# Altium PCB SSB-Demod.PcbDoc
Units mm, origin at the board's own origin, x right, y up, seen from the top; angles counter-clockwise.
Board outline 90.2 x 38.1 mm, 2 copper layers (Top Layer, Bottom Layer); 120 components, 62 nets, 295 pads, 81 vias.
Unrouted connection lines stored in the file: 25.
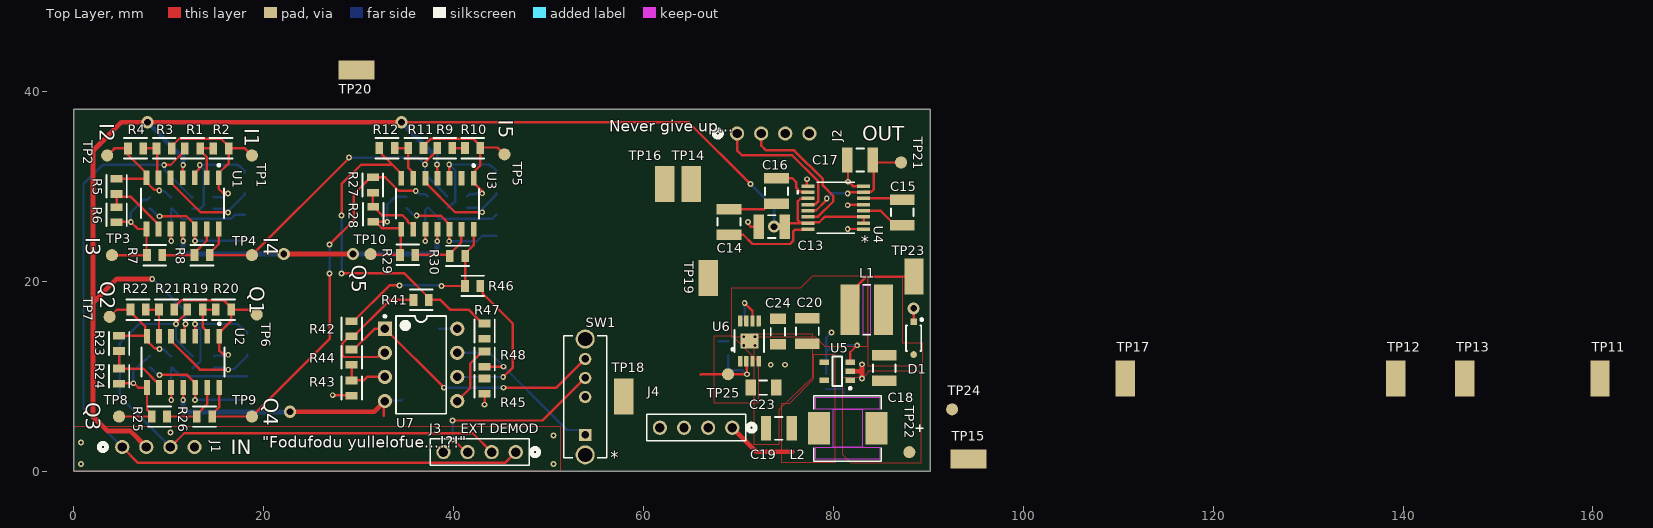
[diagram p0: Top Layer view]
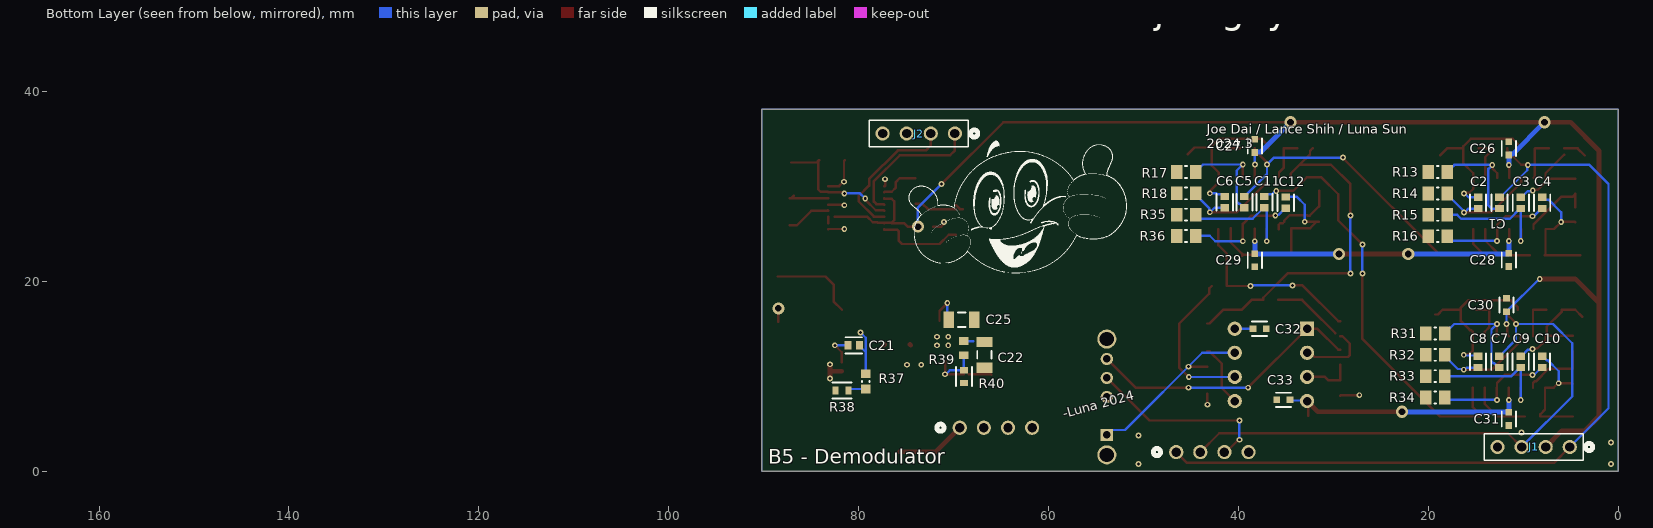
[diagram p1: Bottom Layer view, seen from below]
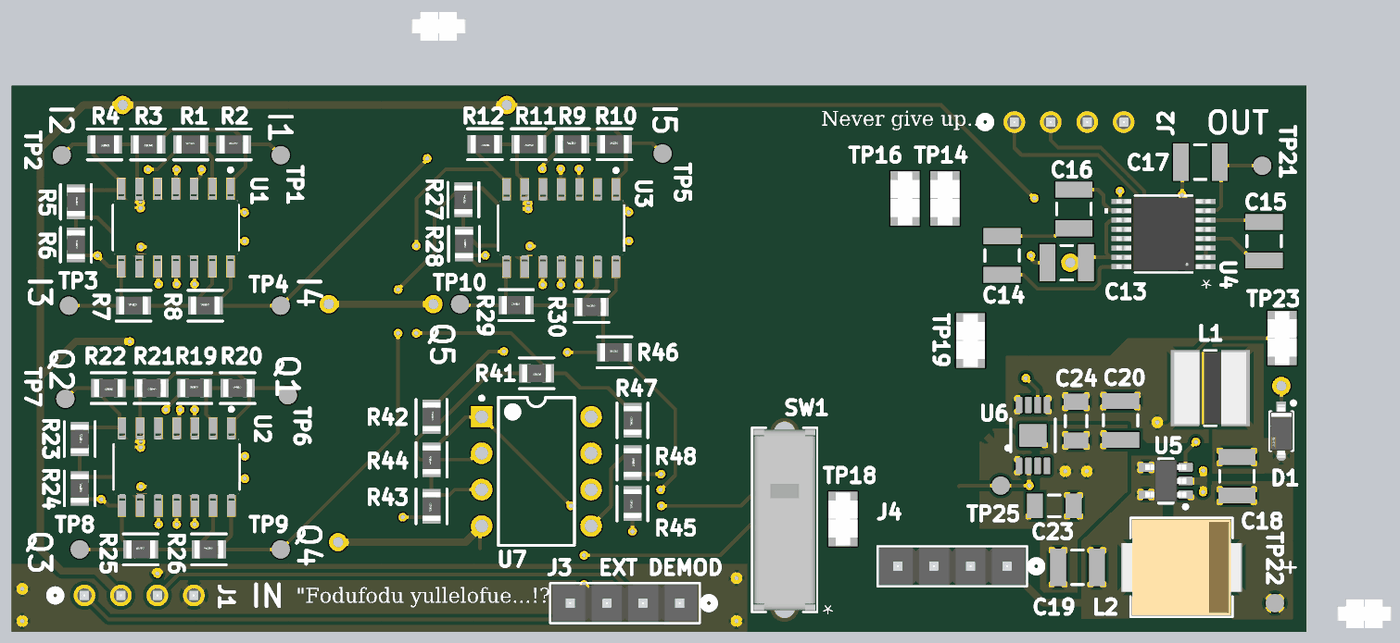
[diagram p2: 3D render of the assembled board from above, using the file's embedded part models]
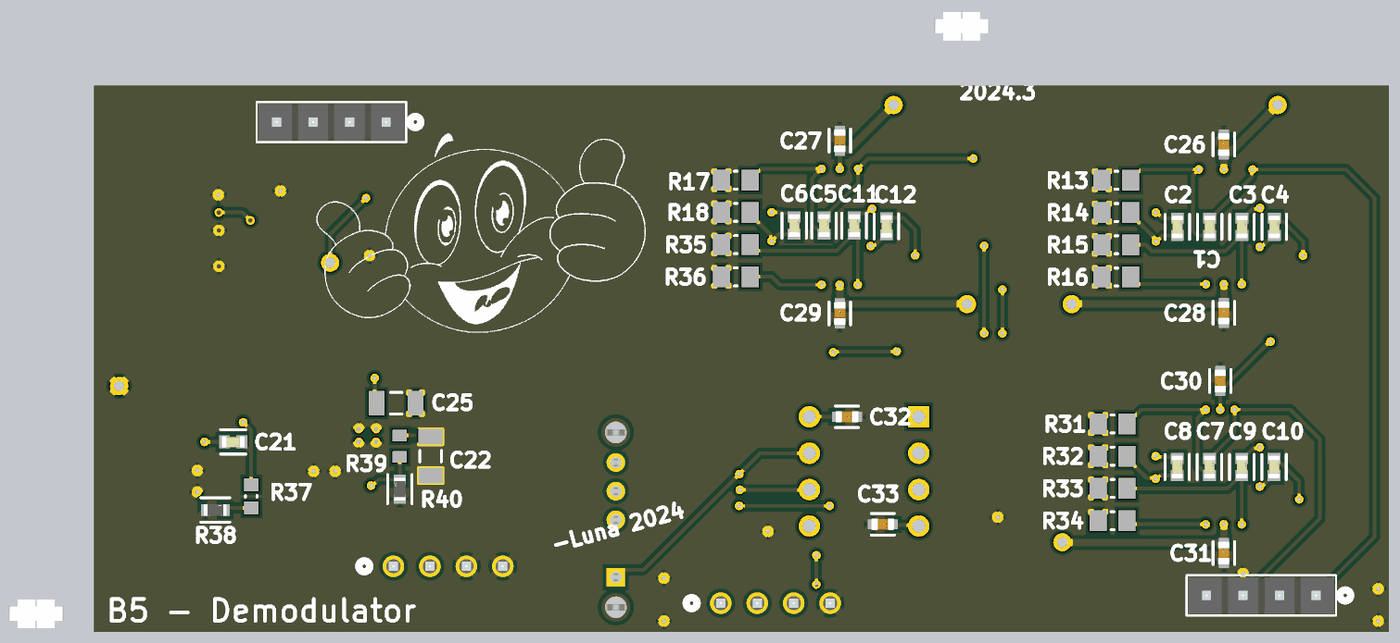
[diagram p3: 3D render of the assembled board from below, using the file's embedded part models]

## Layer stack, top to bottom
Top Solder: solder mask 0.0102, Solder Resist, Dk 3.5
Top Layer: signal copper 0.0356
Dielectric 1: dielectric 0.32, FR-4, Dk 4.8
Bottom Layer: signal copper 0.0356
Bottom Solder: solder mask 0.0102, Solder Resist, Dk 3.5

## Board outline
0,0 0,38.1 90.2,38.1 90.2,0

## Design rules (kind name [scope] priority, off if disabled: settings)
Clearance [All] p1: gap=0.254 ignorepadtopadclearanceinfootprint=FALSE except(0: Arc-Hole Track-Hole SMDPad-Hole THPad-Hole Via-Hole Fill-Hole Poly-Hole Region-Hole Text-Hole; 0.127: SMDPad-SMDPad)
HoleSize [All] p1: absolutevalues=TRUE maxlimit=22.86 minlimit=0.305 maxpercent=80.000 minpercent=20.000
MinimumSolderMaskSliver [All] p1: minsoldermaskwidth=0.025
PolygonConnect [All] p1: connectstyle=Relief reliefconductorwidth=0.512 reliefentries=4 polygonreliefangle="45 Angle" airgapwidth=0.254
RoutingVias [All] p1: holewidth=0.305 width=0.61 viastyle="Through Hole" minholewidth=0.305 minwidth=0.61 maxholewidth=2.54 maxwidth=5.08
SilkToSilkClearance [All] p1: silktosilkclearance=0
SilkToSolderMaskClearance [IsPad] p1: minsilkscreentomaskgap=0.025 clearancetoexposedcopper=TRUE
SolderMaskExpansion [All] p1: expansion=0.102 istentingtop=FALSE
Width [All] p1: maxlimit=5.08 minlimit=0.254 preferedwidth=0.254
26 further rules are at their usual default settings.

## Classes and differential pairs
component class U_SummingAmplifier: C32 C33 R41 R42 R43 R44 U7
component class U_DifferenceAmplifier: R45 R46 R47 R48
component class TopLevel: J1 J2 J3 J4 SW1 TP11 TP12 TP13 TP14 TP15 TP16 TP17 TP18 TP19 TP20
component class U_SSBDemod: C1 C2 C3 C4 C5 C6 C7 C8 C9 C10 C11 C12 C26 C27 C28 C29 C30 C31 R1 R2 R3 R4 R5 R6 R7 R8 R9 R10 R11 R12 R13 R14 R15 R16 R17 R18 R19 R20 R21 R22 R23 R24 R25 R26 R27 R28 R29 R30 R31 R32 R33 R34 R35 R36 TP1 TP2 TP3 TP4 TP5 TP6 TP7 TP8 TP9 TP10 U1 U2 U3
component class U_PowerRail: C18 C19 C20 C21 C22 C23 C24 C25 D1 L1 L2 R37 R38 R39 R40 TP22 TP23 TP24 TP25 U5
component class U_AudioAmp: C13 C14 C15 C16 C17 TP21 U4

## Components (designator, comment, footprint, x,y, rotation, side; value= is the part's Value field where it differs from the comment)
C1 "0.01uF" FP-C0603C-CF-MFG 12.487,28.25 r270 bottom value="10,000 pF"
C2 "0.01uF" FP-C0603C-CF-MFG 14.737,28.25 r270 bottom value="10,000 pF"
C3 "0.01uF" FP-C0603C-CF-MFG 10.237,28.25 r270 bottom value="10,000 pF"
C4 "0.01uF" FP-C0603C-CF-MFG 7.987,28.25 r270 bottom value="10,000 pF"
C5 "0.01uF" FP-C0603C-CF-MFG 39.35,28.337 r270 bottom value="10,000 pF"
C6 "0.01uF" FP-C0603C-CF-MFG 41.425,28.337 r270 bottom value="10,000 pF"
C7 "0.01uF" FP-C0603C-CF-MFG 12.5,11.5 r270 bottom value="10,000 pF"
C8 "0.01uF" FP-C0603C-CF-MFG 14.75,11.5 r270 bottom value="10,000 pF"
C9 "0.01uF" FP-C0603C-CF-MFG 10.25,11.5 r270 bottom value="10,000 pF"
C10 "0.01uF" FP-C0603C-CF-MFG 8,11.5 r270 bottom value="10,000 pF"
C11 "0.01uF" FP-C0603C-CF-MFG 37.25,28.337 r270 bottom value="10,000 pF"
C12 "0.01uF" FP-C0603C-CF-MFG 35,28.287 r270 bottom value="10,000 pF"
C13 "885012209047" 1210 73.5,25.75 r180 top value=1UF
C14 "885012209047" 1210 69,26.25 r270 top value=1UF
C15 "885012209047" 1210 87.25,27.25 r270 top value=1UF
C16 "885012209047" 1210 74,29.5 r90 top value=1UF
C17 "885012209047" 1210 82.804,32.766 r180 top value=1UF
C18 "885012209047" 1210 85.35,10.85 r270 top value=1UF
C19 "885012109014" 1210 74.25,4.5 r0 top value=22UF
C20 "885012109014" 1210 77.25,14.75 r90 top value=22UF
C21 "C0603C331F5GACTU" FP-C0603C-CF-MFG 80.5,13.25 r0 bottom value="330 pF"
C22 "885012008055" 1206 66.75,12.25 r90 bottom value=10000PF
C23 "885012208069" 1206 72.631,8.792 r180 top value=10UF
C24 "885012208069" 1206 74.15,14.7 r90 top value=10UF
C25 "885012008055" 1206 69.15,15.95 r0 bottom value=10000PF
C26 "C1608X7R1H104K080AA" FP-C1608-080-0_1-MFG 11.5,34 r270 bottom
C27 "C1608X7R1H104K080AA" FP-C1608-080-0_1-MFG 38.25,34.262 r270 bottom
C28 "C1608X7R1H104K080AA" FP-C1608-080-0_1-MFG 11.5,22.25 r270 bottom
C29 "C1608X7R1H104K080AA" FP-C1608-080-0_1-MFG 38.25,22.212 r270 bottom
C30 "C1608X7R1H104K080AA" FP-C1608-080-0_1-MFG 11.75,17.5 r270 bottom
C31 "C1608X7R1H104K080AA" FP-C1608-080-0_1-MFG 11.5,5.5 r270 bottom
C32 "C1608X7R1H104K080AA" FP-C1608-080-0_1-MFG 37.75,15 r0 bottom
C33 "C1608X7R1H104K080AA" FP-C1608-080-0_1-MFG 35.25,7.5 r0 bottom
D1 "MBR0580-TP" FP-SOD-123-IPC_C 88.45,14 r270 top
J1 "PRPC004SAAN-RC" CONN4_PRPC004_SUL 5.08,2.54 r180 bottom
J2 "PRPC004SAAN-RC" CONN4_PRPC004_SUL 69.85,35.56 r180 bottom
J3 "PRPC004SAAN-RC" CONN4_PRPC004_SUL 46.54,2 r0 top
J4 "PRPC004SAAN-RC" CONN4_PRPC004_SUL 69.342,4.572 r0 top
L1 "SRR4028-470Y" IND_BOURNS_SRR4028 83.5,17 r0 top
L2 "ASPI-0630LR-150M-T15" IND_ASPI-0630LR_ABR 81.5,4.5 r180 top
R1 "100k" FP-RC0805-0_6-IPC_C 12.487,34 r0 top
R2 "100k" FP-RC0805-0_6-IPC_C 15.487,34 r0 top
R3 "100k" FP-RC0805-0_6-IPC_C 9.5,34 r180 top
R4 "100k" FP-RC0805-0_6-IPC_C 6.487,34 r180 top
R5 "100k" FP-RC0805-0_6-IPC_C 4.487,30 r270 top
R6 "100k" FP-RC0805-0_6-IPC_C 4.487,27 r270 top
R7 "100k" FP-RC0805-0_6-IPC_C 8.5,22.75 r0 top
R8 "100k" FP-RC0805-0_6-IPC_C 13.5,22.75 r0 top
R9 "100k" FP-RC0805-0_6-IPC_C 39.052,34.012 r0 top
R10 "100k" FP-RC0805-0_6-IPC_C 42,34.012 r0 top
R11 "100k" FP-RC0805-0_6-IPC_C 36.023,34.012 r180 top
R12 "100k" FP-RC0805-0_6-IPC_C 32.975,34.012 r180 top
R13 "280" RESC2013X60X35ML10T20 18.987,31.5 r180 bottom
R14 "2.21k" RESC2013X60X35ML10T20 18.987,29.25 r180 bottom
R15 "8.87k" RESC2013X60X35ML10T20 18.987,27 r180 bottom
R16 "35.7k" RESC2013X60X35ML10T20 18.987,24.75 r180 bottom
R17 "143k" RESC2013X60X35ML10T20 45.5,31.512 r180 bottom
R18 "649k" RESC2013X60X35ML10T20 45.5,29.262 r180 bottom
R19 "100k" FP-RC0805-0_6-IPC_C 12.75,17 r0 top
R20 "100k" FP-RC0805-0_6-IPC_C 15.75,17 r0 top
R21 "100k" FP-RC0805-0_6-IPC_C 9.75,17 r180 top
R22 "100k" FP-RC0805-0_6-IPC_C 6.75,17 r180 top
R23 "100k" FP-RC0805-0_6-IPC_C 4.75,13.448 r270 top
R24 "100k" FP-RC0805-0_6-IPC_C 4.75,10 r270 top
R25 "100k" FP-RC0805-0_6-IPC_C 9,5.75 r0 top
R26 "100k" FP-RC0805-0_6-IPC_C 13.75,5.75 r0 top
R27 "100k" FP-RC0805-0_6-IPC_C 31.475,30.139 r270 top
R28 "100k" FP-RC0805-0_6-IPC_C 31.525,27.062 r270 top
R29 "100k" FP-RC0805-0_6-IPC_C 35.15,22.787 r0 top
R30 "100k" FP-RC0805-0_6-IPC_C 40.402,22.662 r0 top
R31 "976" RESC2013X60X35ML10T20 19.25,14.5 r180 bottom
R32 "4.42k" RESC2013X60X35ML10T20 19.25,12.25 r180 bottom
R33 "17.8k" RESC2013X60X35ML10T20 19.25,10 r180 bottom
R34 "71.5k" RESC2013X60X35ML10T20 19.25,7.75 r180 bottom
R35 "294k" RESC2013X60X35ML10T20 45.5,27.012 r180 bottom
R36 "2.26M" RESC2013X60X35ML10T20 45.5,24.762 r180 bottom
R37 "RC0603FR-0746K4L" RESC0603(1608)_N 79.25,9.45 r90 bottom value="46400.00 Ohm"
R38 "RC0603FR-0710KL" FP-RC0603-0_55-IPC_C 81.75,8.5 r180 bottom
R39 "RC0603FR-0732K4L" RESC1608X55X25ML10T15 68.9,12.95 r90 bottom
R40 "RC0603FR-0710KL" FP-RC0603-0_55-IPC_C 68.9,9.95 r90 bottom
R41 "100k" FP-RC0805-0_6-IPC_C 36.576,18.034 r180 top
R42 "100k" FP-RC0805-0_6-IPC_C 29.25,15 r270 top
R43 "100k" FP-RC0805-0_6-IPC_C 29.25,8.75 r90 top
R44 "100k" FP-RC0805-0_6-IPC_C 29.25,12 r90 top
R45 "100k" FP-RC0805-0_6-IPC_C 43.25,8.948 r90 top
R46 "100k" FP-RC0805-0_6-IPC_C 42,19.5 r0 top
R47 "100k" FP-RC0805-0_6-IPC_C 43.25,14.75 r90 top
R48 "100k" FP-RC0805-0_6-IPC_C 43.25,11.802 r270 top
SW1 "OS103011MS8QP1" DIP4_SP3T-TOP_4P3X8P6_CNK 53.848,3.81 r180 top
TP1 "I1" TP-PAD 18.75,33.25 r0 top
TP2 "I2" TP-PAD 3.5,33.25 r0 top
TP3 "I3" TP-PAD 4,22.75 r0 top
TP4 "I4" TP-PAD 18.75,22.75 r0 top
TP5 "I5" TP-PAD 45.35,33.362 r90 top
TP6 "Q1" TP-PAD 19.25,16.5 r90 top
TP7 "Q2" TP-PAD 3.75,16.25 r90 top
TP8 "Q3" TP-PAD 4.75,5.75 r90 top
TP9 "Q4" TP-PAD 18.75,5.75 r90 top
TP10 "Q5" TP-PAD 31.242,22.86 r90 top
TP11 "EXT_DEMOD_IN" KSTN-5019_V 160.75,9.75 r90 top
TP12 "IN_I" KSTN-5019_V 139.25,9.75 r90 top
TP13 "SUM_OUT" KSTN-5019_V 146.5,9.75 r90 top
TP14 "AUDIO_L" KSTN-5019_V 65.024,30.226 r90 top
TP15 "IN_Q" KSTN-5019_V 94.234,1.27 r180 top
TP16 "AUDIO_R" KSTN-5019_V 62.23,30.226 r270 top
TP17 "DIFF_OUT" KSTN-5019_V 110.75,9.75 r90 top
TP18 "OUT" KSTN-5019_V 57.912,7.874 r270 top
TP19 "GND" KSTN-5019_V 66.802,20.32 r90 top
TP20 "GND" KSTN-5019_V 29.75,42.25 r0 top
TP21 "AUDIO_VSS" TP-PAD 87.122,32.512 r0 top
TP22 "SW" TP-PAD 88,2 r270 top
TP23 "V_NEG" KSTN-5019_V 88.5,20.5 r90 top
TP24 "CUK_FB" TP-PAD 92.5,6.5 r90 top
TP25 "LDO_FB" TP-PAD 68.9,10.2 r180 top
U1 "OPA4197IDR" FP-D0014A-MFG 11.447,28.2 r270 top
U2 "OPA4197IDR" FP-D0014A-MFG 11.5,11.5 r270 top
U3 "OPA4197IDR" FP-D0014A-MFG 38.29,28.162 r270 top
U4 "MAX9722AEUE+" 21-0066J_16 80.25,27.75 r180 top
U5 "LM2611AMF/NOPB" DBV0005A_N 80.4,10.525 r180 top
U7 "LM4562NA" N08E 36.56,11.19 r0 top

## Footprints (in the part's own frame and the unit in brackets; to place one, negate y for a bottom-side part, rotate by r counter-clockwise, add the part's x,y. Pads: shape width x height; smd on the part's side, far side on the other; paste and mask are expansions set on the pad)
21-0066J_16 [mm]
  rect 1.379x0.355 smd paste+0 mask+0: 1(-2.937,2.275) 2(-2.937,1.625) 3(-2.937,0.975) 4(-2.937,0.325) 5(-2.937,-0.325) 6(-2.937,-0.975) 7(-2.937,-1.625) 8(-2.937,-2.275) 9(2.937,-2.275) 10(2.937,-1.625) 11(2.937,-0.975) 12(2.937,-0.325) 13(2.937,0.325) 14(2.937,0.975) 15(2.937,1.625) 16(2.937,2.275)
  silkscreen extent -2,-2.68 4.13,2.68, body extent -3.28,-2.55 3.28,2.55, height 1.09
1206 [mm] "Chip Capacitor, Body 3.2x1.6mm, IPC High Density"
  rect 1.1x1.7 smd: 1(-1.35,0) 2(1.35,0)
  silkscreen extent -0.4,-0.75 0.4,0.75, body extent -1.7,-0.9 1.7,0.9, height 1.3
1210 [mm] "Chip Capacitor, Body 3.2x2.5mm, IPC High Density"
  rect 1.1x2.6 smd: 1(-1.35,0) 2(1.35,0)
  silkscreen extent -0.4,-1.2 0.4,1.2, body extent -1.7,-1.35 1.7,1.35, height 1.3
CONN4_PRPC004_SUL [mil]
  round 59 / inner round 60 / far side round 59 hole 39 paste-99999 mask+0: 1(0,0) 2(-100,0) 3(-200,0) 4(-300,0)
  silkscreen extent -355,-55 95,55, body extent -350,-50 50,50, height 340
DBV0005A_N [mm] "SOT23, 5-Leads, Body 3.05x1.75mm, Pitch 0.95mm, IPC Medium Density"
  rrect17% 1x0.6 smd: 1(-1.375,0.95) 2(-1.375,0) 3(-1.375,-0.95) 4(1.375,-0.95) 5(1.375,0.95)
  silkscreen extent -1.5,-1.55 0.5,1.92, body extent -1.42,-1.46 1.42,1.46, height 1.08
DIP4_SP3T-TOP_4P3X8P6_CNK [mil]
  rect 51x51 / inner round 60 / far side rect 51x51 hole 31 paste-99999 mask+0: 1(0,0)
  round 51 / inner round 60 / far side round 51 hole 31 paste-99999 mask+0: 2(0,-157.48) 3(0,-236.22) 4(0,-314.96)
  round 79 / inner round 60 / far side round 79 hole 59 paste-99999 mask-39.5: 6(0,82.68) 7(0,-397.64)
  silkscreen extent -90,-410 90,96, body extent -85,-406 85,91, height 343
FP-C0603C-CF-MFG [mm]
  rect 0.75x0.9 smd paste+0 mask+0: 1(-0.6,0) 2(0.6,0)
  silkscreen extent -0.87,-0.85 0.88,0.85, body extent -0.8,-0.4 0.8,0.4, height 0.87
FP-C1608-080-0_1-MFG [mm]
  rect 0.7x0.7 smd paste+0 mask+0: 1(-0.7,0) 2(0.7,0)
  silkscreen extent -0.8,-0.75 0.8,0.75, body extent -0.8,-0.4 0.8,0.4, height 0.9
FP-D0014A-MFG [mm]
  rect 1.55x0.6 smd paste-1000 mask+0: 1(-2.7,3.81) 2(-2.7,2.54) 3(-2.7,1.27) 4(-2.7,0) 5(-2.7,-1.27) 6(-2.7,-2.54) 7(-2.7,-3.81) 8(2.7,-3.81) 9(2.7,-2.54) 10(2.7,-1.27) 11(2.7,0) 12(2.7,1.27) 13(2.7,2.54) 14(2.7,3.81)
  silkscreen extent -4.15,-4.38 1.55,4.38, body extent -3.57,-4.62 3.57,4.62, height 0.25
FP-RC0603-0_55-IPC_C [mm]
  rect 0.659x0.812 smd paste+0 mask+0: 1(-0.677,0) 2(0.677,0)
  silkscreen extent -1.01,-0.85 1.01,0.85, body extent -0.8,-0.4 0.8,0.4, height 0.55
FP-RC0805-0_6-IPC_C [mm]
  rect 0.808x1.262 smd paste+0 mask+0: 1(-0.802,0) 2(0.802,0)
  silkscreen extent -1.21,-1.07 1.21,1.07, body extent -1.31,-0.77 1.31,0.77, height 0.25
FP-SOD-123-IPC_C [mm]
  rect 0.708x0.682 smd paste+0 mask+0: 1(-1.725,0)
  rrect100% 0.708x0.682 smd paste+0 mask+0: 2(1.725,0)
  silkscreen extent -2.09,-0.8 1.35,0.97, body extent -2.18,-0.9 2.18,0.9, height 0.25
IND_ASPI-0630LR_ABR [mil]
  rect 92.5x134 smd paste+0 mask+0: 1(-119.25,0) 2(119.25,0)
  Top Layer keep-out region: -60,-78.74 -60,78.74 60,78.74 60,-78.74
  Top Layer keep-out region: -133,78.74 -133,129 133,129 133,78.74
  Top Layer keep-out region: -133,-129 -133,-78.74 133,-78.74 133,-129
  silkscreen extent -313,-136 140,136, body extent -162,-131 162,131, height 120
IND_BOURNS_SRR4028 [mil]
  rect 79x209 smd paste+0 mask+0: 1(-69,0) 2(69,0)
  Top Layer keep-out region: -15,-102.5 -15,102.5 15,102.5 15,-102.5
  silkscreen extent -16,-104 16,104, body extent -99,-99 99,99, height 118
KSTN-5019_V [mm] "Test Point, 1-Leads, Body 3.81x2.03mm"
  rect 3.8x2.03 smd: 1(0,0)
  body extent -1.9,-1.01 1.9,1.02, height 2.29
N08E [mm] "DIP, 8-Pin, Row Spacing 7.62 mm, Pitch 2.54 mm"
  rect 1.5x1.5 hole 0.9: 1(-3.81,3.81)
  round 1.5 hole 0.9: 2(-3.81,1.27) 3(-3.81,-1.27) 4(-3.81,-3.81) 5(3.81,-3.81) 6(3.81,-1.27) 7(3.81,1.27) 8(3.81,3.81)
  silkscreen extent -3.93,-5.15 2.65,5.23, body extent -3.6,-5.15 3.6,5.15, height 5.33
RESC0603(1608)_N [mm] "Chip Resistor, Body 1.6x0.8mm, IPC Medium Density"
  rect 0.9x1 smd: 1(-0.8,0) 2(0.8,0)
  silkscreen extent -0.05,-0.4 0.05,0.4, body extent -0.85,-0.47 0.85,0.47, height 0.6
RESC1608X55X25ML10T15 [mm] "Chip Resistor, 2-Leads, Body 1.60x0.80mm, IPC Low Density"
  rect 0.8x1 smd: 1(-0.75,0) 2(0.75,0)
  body extent -0.85,-0.45 0.85,0.45, height 0.55
RESC2013X60X35ML10T20 [mm] "Chip Resistor, 2-Leads, Body 2.00x1.25mm, IPC Low Density"
  rect 1.2x1.45 smd: 1(-1,0) 2(1,0)
  silkscreen extent -0.1,-0.63 0.1,0.63, body extent -1.05,-0.67 1.05,0.67, height 0.6
TP-PAD [mm]
  round 1.27 smd: 1(0,0)

## Part data
C1 C2 C3 C4 C5 C6 C7 C8 C9 C10 C11 C12: library part CMP-2006-03370-2, "CAP CER 10000PF 25V 1% NP0 0603", Capacitance="10,000 pF", Manufacturer=KEMET, Manufacturer Part Number=C0603C103F3GACTU, Package=C0603C-CF, Temperature="-55°C to +125°C", Temperature Characteristic=C0G, Temperature Coefficient=30ppm/°C, Temperature Range High=+125°C, Temperature Range Low=-55°C, Tolerance=0.01, Voltage Rating="25 V", Automotive=Yes, Automotive Grade="Grade 1", Category=Cap, ComponentLink2Description=Datasheet, ComponentLink2URL=https://api.kemet.com/component-edge/download/datasheet/C0603C100J5GACAUTO.pdf, Device Class L1="Passive Components", Device Class L2=Capacitors, Device Class L3="Ceramic Capacitors", Digikey Description="CAP CER 10000PF 25V 1% NP0 0603", Height=0.87mm, Lead Free=Yes, Material=Ceramic, Mouser Description="Multilayer Ceramic Capacitors MLCC - SMD/SMT 25volts 10000pF 1% C0G", Octopart=https://octopart.com/c0603c103f3gactu-kemet-12577573, RoHS=TRUE
C13 C14 C15 C16 C17 C18: library part "CAP CER 1UF 50V X7R 1210", "Capacitor", Voltage Rating=50V, LatestRevisionDate=17-Jul-2002, LatestRevisionNote="Re-released for DXP Platform.", Manufacturer Part Number=885012209047, Published=8-Jun-2000, Publisher="Altium Limited"
C19 C20: library part "CAP CER 22UF 25V X5R 1210", "Capacitor", Voltage Rating=25V, LatestRevisionDate=17-Jul-2002, LatestRevisionNote="Re-released for DXP Platform.", Manufacturer Part Number=885012109014, Published=8-Jun-2000, Publisher="Altium Limited"
C21: library part CMP-1035-01569-3, "CAP CER 330PF 50V 1% NP0 0603", Capacitance="330 pF", Manufacturer=KEMET, Package=C0603C-CF, Temperature="-55°C to +125°C", Temperature Characteristic=C0G, Temperature Coefficient=30ppm/°C, Temperature Range High=+125°C, Temperature Range Low=-55°C, Tolerance=0.01, Voltage Rating="50 V", Automotive=Yes, Automotive Grade="Grade 1", Category=Cap, ComponentLink2Description=Datasheet, ComponentLink2URL=https://api.kemet.com/component-edge/download/datasheet/C0603C100J5GACAUTO.pdf, Device Class L1="Passive Components", Device Class L2=Capacitors, Device Class L3="Ceramic Capacitors", Digikey Description="CAP CER 330PF 50V 1% NP0 0603", Height=0.87mm, Lead Free=Yes, Manufacturer Part Number=C0603C331F5GACTU, Material=Ceramic, Mouser Description="Multilayer Ceramic Capacitors MLCC - SMD/SMT 50volts 330pF C0G 1%", Octopart=https://octopart.com/c0603c331f5gactu-kemet-9142706, RoHS=TRUE
C22 C25: library part "CAP CER 10000PF 50V C0G/NP0 1206", "Capacitor", Voltage Rating=50V, LatestRevisionDate=17-Jul-2002, LatestRevisionNote="Re-released for DXP Platform.", Manufacturer Part Number=885012008055, Published=8-Jun-2000, Publisher="Altium Limited"
C23 C24: library part "CAP CER 10UF 25V X7R 1206", "Capacitor", Voltage Rating=25V, LatestRevisionDate=17-Jul-2002, LatestRevisionNote="Re-released for DXP Platform.", Manufacturer Part Number=885012208069, Published=8-Jun-2000, Publisher="Altium Limited"
C26 C27 C28 C29 C30 C31 C32 C33: library part CMP-2000-04982-2, "Multilayer Ceramic Capacitors 100nF ±10% 50V X7R SMD 0603", Capacitance=100nF, Case Code (Imperial)=0603, Case Code (Metric)=1608, Dielectric=X7R, Dielectric Material=Ceramic, Max Operating Temperature=125°C, Min Operating Temperature=-55°C, Package Quantity=1, Tolerance=10%, Voltage=50V, Case/Package=0603, Construction=Flat, Depth=0.8mm, Height=0.8mm, Lead Free="Lead Free", Length=1.6mm, Mount="Surface Mount", Number of Pins=2, Packaging="Tape and Reel", Radiation Hardening=No, REACH SVHC="No SVHC", Resistor Type=Ceramic, RoHS Compliant=Yes, Series=C, Termination=SMD/SMT, Thickness=0.037inch, Voltage Rating=50V, Voltage Rating (DC)=50V, Weight=7.1E-05oz, Width=0.031inch
D1: library part CMP-56206-000006-1, "DIODE SCHOTTKY 80V 500MA SOD123", Average Rectified Current=500mA, Forward Voltage=800mV, Max Operating Temperature=150°C, Max Power Dissipation=410mW, Max Repetitive Reverse Voltage (Vrrm)=80V, Max Reverse Leakage Current=200uA, Max Surge Current=5.5A, Min Operating Temperature=-55°C, Package Quantity=1, Lead Free="Lead Free", Max Reverse Voltage (DC)=80V, Mount="Surface Mount", Packaging="Tape and Reel", Peak Reverse Current=200uA
J1 J2 J3 J4: "No Description Available", Mfr_Name=Sullins, RefDes=RefDes, Type="Headers, Male Pins"
L1: "No Description Available", Mfr_Name="Bourns Electronics"
L2: "No Description Available", Mfr_Name=Abracon, Type="Fixed Inductors"
R1 R2 R3 R4 R5 R6 R7 R8 R9 R10 R11 R12 R19 R20 R21 R22 R23 R24 R25 R26 R27 R28 R29 R30 R41 R42 R43 R44 R45 R46 R47 R48: library part CMP-2100-03668-5, "RES 100K OHM 1% 1/8W 0805", Case Code (Imperial)=0805, Case Code (Metric)=2012, Max Operating Temperature=155°C, Max Power Dissipation=125mW, Min Operating Temperature=-55°C, Package Quantity=1, Resistance=100kR, Resistance Tolerance=1%, Resistor Type="Thick Film", Temperature Coefficient=100ppm/°C, Voltage Rating=150V, Case/Package=0805, Construction=Rectangular, Depth=1.25mm, Features="Moisture Resistant", Height=0.024inch, Lead Free="Lead Free", Lead Pitch=0.4mm, Length=0.079inch, Military Standard=Not, Number of Pins=2, Number of Terminations=2, Packaging="Tape and Reel", Power Rating=125mW, RoHS Compliant=Yes, Series=RC, Size Code=0805, Technology="THICK FILM", Termination=SMD/SMT, Tolerance=1%, Voltage Rating (DC)=150V, Width=0.049inch
R13 R15 R16 R17 R18 R31 R32 R33 R34 R35 R36: library part CMP-2001-01038-1, Manufacturer=Yageo, Part Number=RC0805FR-07280RL
R14: library part CMP-2001-01038-1, Manufacturer=Yageo, Part Number=RC0805FR-072K21L
R37: library part CMP-1012-00698-1, "46K4 0.1W 1% 0603 (1608 Metric)  SMD / RC0603FR-0746K4L Yageo", Case-EIA=0603, Case-Metric=1608, Power="0.1 W", Tolerance="1 %", Technology=SMT
R38 R40: library part CMP-2100-03664-2, "RES 10K OHM 1% 1/10W 0603", Case Code (Imperial)=0603, Case Code (Metric)=1608, Max Operating Temperature=155°C, Max Power Dissipation=100mW, Min Operating Temperature=-55°C, Resistance=10kR, Resistance Tolerance=1%, Resistor Type="Thick Film", Temperature Coefficient=100ppm/°C, Voltage Rating=75V, Voltage Rating (DC)=50V, Case/Package=0603, Construction=Rectangular, Depth=0.8mm, Features="Moisture Resistant", Height=0.45mm, Lead Free="Lead Free", Lead Pitch=0.3mm, Length=1.6mm, Military Standard=Not, Number of Pins=2, Number of Terminations=2, Packaging="Tape and Reel", Power Rating=100mW, RoHS Compliant=Yes, Series=RC, Size Code=0603, Termination=SMD/SMT, Tolerance=1%, Weight=7.1E-05oz, Width=0.8mm
R39: library part CMP-2000-04011-1, Manufacturer=Yageo, Part Number=RC0603FR-0732K4L
SW1: "No Description Available", Mfr_Name="C&K Components", RefDes=RefDes, Type="Slide Switches"
TP1 TP2 TP3 TP4 TP5 TP6 TP7 TP8 TP9 TP10 TP21 TP22 TP24 TP25: library part TP-PAD
TP11 TP12 TP13 TP14 TP15 TP16 TP17 TP18 TP19 TP20 TP23: library part CMP-1672-00008-1, "Test Point, 1 Position SMD, RoHS, Tape and Reel", Package Quantity=1000, ComponentLink1Description="Manufacturer URL", ComponentLink1URL=http://www.keyelco.com/, ComponentLink2Description=Datasheet, ComponentLink2URL=http://www.keyelco.com/product-pdf.cfm?p=1357, Contact Plating=Silver, DatasheetVersion=03/2014, Mount="Surface Mount", Mounting Technology="Surface Mount", PackageDescription="1-Pin Surface Mount Device, Body 3.81 x 2.03 mm", PackageReference=5019, Packaging="Tape and Reel", Pins=1, RoHSCompliant=True
U1 U2 U3: library part CMP-04895-000272-1, "IC OPAMP GP 4 CIRCUIT 14SOIC", Case/Package=SOIC, Max Operating Temperature=125°C, Min Operating Temperature=-40°C, Gain Bandwidth Product=10MHz, Lead Free="Lead Free", Number of Channels=4, RoHS Compliant=Yes
U4: "No Description Available", Mfr_Name="Analog Devices Inc", RefDes=RefDes, Type=Type
U5: library part CMP-0069-01160-3, "1.4MHz Cuk Converter, 5-pin SOT-23, Pb-Free", Manufacturer="Texas Instruments", PackageTopMarking=S40A*XTT, PowerWise=N, ComponentLink1Description="Datasheet URL", ComponentLink1URL=http://www.ti.com/general/docs/lit/getliterature.tsp?genericPartNumber=LM2611&fileType=pdf, CompType=Switcher, PackageDescription="Molded SOT-23, .115 x .063 x .040 in Body, 5 Lead, .0375 in Pitch", PackageReference=DBV0005A, PinCount=5, RoHS=Y
U7: library part CMP-0057-00043-2, "Dual High Performance, High Fidelity Audio Operational Amplifier, 8-pin MDIP", Manufacturer="National Semiconductor", PackageTopMarking=NSUZXYTT*LM*4562NA, PowerWise=Y, Code_JEDEC=MS-001-BA, ComponentLink1Description="LM4562 Datasheet", ComponentLink1URL=http://www.national.com/ds/LM/LM4562.pdf, ComponentLink2Description="LM4562 Web Page", ComponentLink2URL=http://www.national.com/pf/LM/LM4562.html, ComponentLink3Description="N08E Package Page", ComponentLink3URL=http://www.national.com/packaging/folders/n08e.html, CompType="Audio IC", DatasheetVersion=Jan-2010, PackageDescription="MDIP, .365 x .250 x .130in, 8 Lead, .100in Pitch", PackageReference=N08E, PackageVersion="revG, May-2006", PinCount=8, RevisionNote="Component URLs added", RoHS=Y

## Free pads (board coordinates)
  rrect22% 0.45x1.15 smd: 1(70.175,11.575) 2(70.825,11.575) 3(71.475,11.575) 4(72.125,11.575) 5(72.125,15.825) 6(71.475,15.825) 7(70.825,15.825) 8(70.175,15.825)
  rrect6% 1.89x1.57 smd: 9(71.15,13.7)

## Via types
v1: diameter 0.61, hole 0.305, Top Layer to Bottom Layer, 74 vias
v2: diameter 1.27, hole 0.711, Top Layer to Bottom Layer, 7 vias

## Nets (pads, with @x,y where several pads share a name; then routed paths per layer and width w, separated by ;. In a path a pad name is that pad's centre, name@x,y a point inside that pad or via, vN(x,y) a via of type N, cw(c..) or ccw(c..) an arc to the next point about the centre after c; other vN are vias at no path point)
+5: C13.1 C19.2 C26.2 C27.2 C30.2 C32.2 J1.2 J4.1 L2.2 U1.4 U2.4 U3.4 U4.2 U4.3 U4.11 U4.15 U5.4 U5.5 U7.8 | length 166.7
  Top Layer w0.254: U1.4 11.473,30.927 11.473,32.223 v1(11.5,32.25) ; U2.4 11.673,14.373 11.673,15.327 11.75,15.404 v1(11.75,15.5) ; v2(34.5,36.75) 64.75,36.75 v1(71.25,30.25) ; v1(38.25,32.296) 38.27,32.276 38.27,30.882 U3.4 ; v2(73.75,25.75) C13.1 75.225,26.125 76.507,26.125 ; U4.11 77.262,28.675 76.507,28.675 76.242,28.41 76.242,26.44 76.507,26.175 77.262,26.175 U4.15 77.363,26.175 77.983,26.175 78.024,26.217 78.503,26.217 79.062,26.775 U4.3@82.537,26.775 ; U4.2 U4.3
  Top Layer w0.512: J1.2 5.921,4.239 3.511,4.239 2,5.75 2,17.75 ; v1(8.25,20.25) 4.5,20.25 2,17.75 ; v2(34.5,36.75) v2(7.75,36.75) 5,36.75 2,33.75 2,17.75 ; J4.1 71.882,2.032 75.692,2.032
  Bottom Layer w0.254: v1(8.25,20.25) 8.3,20.25 C30.2 v1(11.75,15.5) ; C27.2@38.195,33.617 C27.2 v1(38.25,32.296) ; C32.2 U7.8 ; v1(71.25,30.25) 73.75,27.75 v2(73.75,25.75)
  Bottom Layer w0.508: v2(7.75,36.75) 11.104,33.396 11.404,33.396 C26.2 v1(11.5,32.25)
  Bottom Layer w0.512: v2(34.5,36.75) 37.633,33.617 C27.2@38.195,33.617
-5: C22.2 C23.2 C28.1 C29.1 C31.1 C33.1 J4.2 pad.1 R39.2 U1.11 U2.11 U3.11 U7.4 | length 60.7
  Top Layer w0.254: U1.11 11.473,25.473 11.473,24.277 v1(11.5,24.25) ; v1(11.5,7.5) U2.11 ; 32.625,5.825 U7.4@32.625,7.255 ; U3.11@38.256,25.556 38.256,24.218 v1(38.263,24.212)
  Top Layer w0.508: v2(22.098,22.86) v2(29.388,22.86)
  Top Layer w0.512: v2(22.75,6.25) 31.62,6.25 32.625,7.255 U7.4
  Bottom Layer w0.254: C28.1 C28.1@11.525,22.975 ; v2(29.388,22.86) v2@29.414,22.886 ; U7.4 32.81,7.44 34.49,7.44 C33.1 ; C29.1@38.224,22.886 C29.1 C29.1@38.256,22.918 ; v1@38.256,24.206 v1(38.263,24.212) ; 67.9,13.7 R39.2
  Bottom Layer w0.512: v1(11.5,7.5) C31.1 11.531,6.231 22.731,6.231 v2(22.75,6.25) ; C28.1 v1(11.5,24.25) ; C28.1@11.525,22.975 11.525,22.948 11.594,22.879 22.079,22.879 v2(22.098,22.86) ; v2@29.414,22.886 C29.1@38.224,22.886 ; C29.1@38.256,22.918 v1@38.256,24.206
AUDIO_L: J2.2 TP14.1 U4.14 | length 15.5
  Top Layer w0.254: J2.2@72.39,35.645 72.39,34.29 72.898,33.782 75.863,33.782 78.891,30.754 78.891,30.079 79.985,28.985 79.985,28.417 78.383,26.815 77.352,26.815 U4.14
AUDIO_R: J2.1 TP16.1 U4.12 | length 15
  Top Layer w0.254: J2.1 69.85,33.782 70.358,33.274 75.653,33.274 78.383,30.544 78.383,28.39 78.119,28.125 77.363,28.125 U4.12
EXT_DEMOD_IN: J3.3 SW1.3 TP11.1 | length 20
  Top Layer w0.254: v1(39.878,3.302) 39.974,3.302 41.276,2 J3.3 ; v1(39.878,5.334) 49.372,5.334 SW1.3
  Bottom Layer w0.254: v1(39.878,3.302) v1(39.878,5.334)
GND: C13.2 C17.2 C19.1 C20.1 C23.1 C24.1 C25.1 C26.1 C27.1 C28.2 C29.2 C30.1 C31.2 C32.1 C33.2 D1.1 J1.4 J2.3 J2.4 J3.4 J4.3 J4.4 pad.9 R13.1 R14.1 R15.1 R16.1 R17.1 R18.1 R31.1 R32.1 R33.1 R34.1 R35.1 R36.1 R38.1 R40.1 R43.1 R45.1 TP19.1 TP20.1 U4.1 U4.5 U4.8 U4.9 U5.2 | length 17.4
  Top Layer w0.254: v1(27.25,8) 29.198,8 R43.1 ; v1(43.25,7) R45.1 ; v1(71,26.25) 71.068,26.182 71.068,25.971 71.289,25.75 C13.2 ; v1(77.207,30.75) 77.207,30.075 77.257,30.025 U4.9 ; C17.2 81.534,32.686 v1(81.534,30.48) 81.594,30.48 82.049,30.025 U4.8 ; v1(81.5,25.5) 83.162,25.5 U4.1 ; v1(81.5,28) 81.537,28.037 83.15,28.037 U4.5 ; D1.1 v2(88.45,17.15)
  Top Layer w0.5: C24.1@74.5,13.25 C24.1@74.575,13.325 ; C20.1@77.275,13.325 C20.1@77.35,13.25
  Top Layer w0.508: U5.2 83.025,10.525 ; v1(83,9.75) 83.02,9.77 83.02,10.52 83.025,10.525 ; v1(83,11.25) 83.02,11.23 83.02,10.696 83.025,10.691 83.025,10.525
  other v1: 0.75,0.75 50.5,0.75 0.75,3 50.5,3.75 10.16,4.064 73.4,11.2 74.9,11.2 70.55,13.25 71.75,13.25 70.55,14.15 71.75,14.15
NetC1_2: C1.2 R13.2 U1.3 | length 12.4
  Top Layer w0.254: U1.3 12.717,31.375 13.182,31.84 13.182,32.182 v1(13.25,32.25)
  Bottom Layer w0.254: C1.2 13.318,27.65 13.659,27.991 13.659,31.841 v1(13.25,32.25) 17.237,32.25 17.389,32.098 17.514,32.098 17.987,31.625 R13.2
NetC2_1: C2.1 R2.2 R3.1 TP1.1 U1.1 | length 17.4
  Top Layer w0.254: R3.1 10.302,34.227 11.087,35.012 15.504,35.012 16.289,34.227 R2.2 ; v1(16.237,29.25) 16.169,29.318 15.669,29.318 15.257,29.73 U1.1 15.257,31.375 16.289,32.407 R2.2 ; TP1.1 18,34 R2.2
  Bottom Layer w0.254: C2.1 15.741,28.85 16.141,29.25 v1(16.237,29.25)
NetC2_2: C2.2 R14.2 U1.5 | length 12.2
  Top Layer w0.254: U1.5 10.177,30.425 13.352,27.25 v1(16.237,27.25)
  Bottom Layer w0.254: C2.2 15.741,27.65 16.141,27.25 v1(16.237,27.25) 16.305,27.318 16.305,27.443 17.987,29.125 R14.2
NetC3_1: C3.1 R4.2 R5.1 TP2.1 U1.7 | length 12.6
  Top Layer w0.254: TP2.1 4.25,34 R4.2 ; R5.1 7.539,30.802 U1.7 ; 5.685,33.327 7.637,31.375 U1.7 ; v1(8.987,29.566) 8.919,29.634 8.428,29.634 7.637,30.425 U1.7
  Bottom Layer w0.254: v1(8.987,29.566) 9.055,29.498 9.514,29.498 10.162,28.85 C3.1
NetC3_2: C3.2 R15.2 U1.10 | length 13.1
  Top Layer w0.254: U1.10 10.213,25.463 10.213,24.287 v1(10.25,24.25)
  Bottom Layer w0.254: v1(10.25,24.25) 10.25,27.637 C3.2 10.312,27.65 11.398,26.564 16.521,26.564 16.957,27 R15.2
NetC4_1: C4.1 R6.2 R7.1 TP3.1 U1.8 | length 13.6
  Top Layer w0.254: TP3.1 R7.1 7.637,22.811 U1.8 6.737,25.5 v1(5.987,26.25) 4.539,26.25 R6.2
  Bottom Layer w0.254: v1(5.987,26.25) 5.987,27.25 7.339,28.602 7.739,28.602 C4.1
NetC4_2: C4.2 R16.2 U1.12 | length 12.6
  Top Layer w0.254: v1(9.002,26.849) 11.843,26.849 12.717,25.975 U1.12 12.733,25.483 12.733,24.267 v1(12.75,24.25)
  Bottom Layer w0.254: C4.2 8.062,27.65 8.795,26.917 8.934,26.917 v1(9.002,26.849) ; v1(12.75,24.25) 17.514,24.25 17.987,24.723 R16.2
NetC5_1: C5.1 R8.2 R9.1 TP4.1 U1.14 | length 37
  Top Layer w0.254: U1.14 15.257,23.932 14.302,22.977 R8.2 TP4.1 28.956,32.956 v1(28.956,33.02) ; v1(36.975,32.296) 37.043,32.364 37.043,32.578 38.25,33.785 R9.1
  Bottom Layer w0.254: v1(28.956,33.02) 36.251,33.02 v1(36.975,32.296) 36.975,31.312 39.027,29.26 39.027,29.185 39.275,28.937 C5.1
NetC5_2: C5.2 R17.2 U3.3 | length 12.1
  Top Layer w0.254: v1(39.525,32.296) 39.542,32.278 39.542,30.88 U3.3
  Bottom Layer w0.254: C5.2 39.425,27.737 39.869,28.181 39.958,28.181 40.181,28.404 40.181,31.64 v1(39.525,32.296) 43.716,32.296 43.902,32.11 44.027,32.11 44.5,31.637 R17.2
NetC6_1: C6.1 R10.2 R11.1 TP5.1 U3.1 | length 17
  Top Layer w0.254: R11.1 36.825,34.239 37.61,35.024 42.017,35.024 42.802,34.239 R10.2 ; U3.1@42.06,30.962 42.06,31.437 42.802,32.179 R10.2 ; U3.1 42.1,30.387 42.932,29.555 42.932,29.33 v1(43,29.262) ; TP5.1 44.625,34.087 42.877,34.087 R10.2
  Bottom Layer w0.254: C6.1 41.673,29.185 42.237,29.185 42.314,29.262 v1(43,29.262)
NetC6_2: C6.2 R18.2 U3.5 | length 12.1
  Top Layer w0.254: U3.5 37.02,30.387 40.145,27.262 v1(43,27.262)
  Bottom Layer w0.254: C6.2 42.505,27.737 42.98,27.262 v1(43,27.262) 43.068,27.33 43.068,27.705 44.5,29.137 R18.2
NetC7_2: C7.2 R31.2 U2.3 | length 12.6
  Top Layer w0.254: v1(12.75,15.5) 12.76,15.49 12.76,14.21 U2.3
  Bottom Layer w0.254: C7.2 12.575,10.9 13.019,11.344 13.108,11.344 13.331,11.567 13.331,14.919 v1(12.75,15.5) 17.25,15.5 17.652,15.098 17.777,15.098 18.25,14.625 R31.2
NetC8_1: C8.1 R20.2 R21.1 TP6.1 U2.1 | length 17.6
  Top Layer w0.254: R21.1 10.552,17.227 11.337,18.012 15.767,18.012 16.552,17.227 R20.2 ; v1(16.25,12.25) 16.182,12.318 15.682,12.318 15.31,12.69 U2.1 15.31,14.675 15.483,14.848 15.598,14.848 16.552,15.802 R20.2 ; TP6.1 18.975,16.5 18.475,17 R20.2
  Bottom Layer w0.254: C8.1 14.832,12.182 16.182,12.182 v1(16.25,12.25)
NetC8_2: C8.2 R32.2 U2.5 | length 12.1
  Top Layer w0.254: U2.5 10.23,13.725 13.269,10.686 v1(16.25,10.686)
  Bottom Layer w0.254: C8.2 15.94,10.9 16.154,10.686 v1(16.25,10.686) 16.318,10.754 16.879,10.754 18.25,12.125 R32.2
NetC9_1: C9.1 R22.2 R23.1 TP7.1 U2.7 | length 12.6
  Top Layer w0.254: TP7.1 4.5,17 R22.2 5.948,16.773 7.517,15.204 7.517,14.373 U2.7@7.64,14.25 ; R23.1 U2.7@7.64,14.25 ; v1(9,12.866) 8.932,12.934 8.481,12.934 7.64,13.775 U2.7@7.64,14.25
  Bottom Layer w0.254: v1(9,12.866) 9.068,12.798 9.477,12.798 10.175,12.1 C9.1
NetC9_2: C9.2 R33.2 U2.10 | length 13.1
  Top Layer w0.254: U2.10 10.24,8.79 10.24,7.51 v1(10.25,7.5)
  Bottom Layer w0.254: v1(10.25,7.5) C9.2 10.325,10.9 11.225,10 R33.2
NetC10_1: C10.1 R24.2 R25.1 TP8.1 U2.8 | length 13.5
  Top Layer w0.254: TP8.1 R25.1 8.198,5.977 7.69,6.485 U2.8 6.77,8.8 6.32,9.25 v1(6.25,9.25) 4.802,9.25 R24.2
  Bottom Layer w0.254: v1(6.25,9.25) 6.25,10.514 7.392,11.656 7.481,11.656 7.925,12.1 C10.1
NetC10_2: C10.2 R34.2 U2.12 | length 12.9
  Top Layer w0.254: v1(9,10.134) 11.911,10.134 12.75,9.295 U2.12@12.75,8.77 ; v1(12.75,7.5) 12.76,7.51 12.76,8.76 12.77,8.77 U2.12
  Bottom Layer w0.254: C10.2 8.075,10.9 8.773,10.202 8.932,10.202 v1(9,10.134) ; v1(12.75,7.5) 18,7.5 R34.2
NetC11_1: C11.1 R26.2 R27.1 TP9.1 U2.14 | length 44.8
  Top Layer w0.254: U2.14 15.31,6.735 14.552,5.977 R26.2 TP9.1 26.924,13.924 v1(26.924,20.828) ; v1(26.924,23.876) 29.464,26.416 29.464,29.157 31.248,30.941 R27.1 32.787,30.941 34.216,29.512 v1(36,29.512)
  Bottom Layer w0.254: v1(26.924,20.828) v1(26.924,23.876) ; v1(36,29.512) 36.096,29.512 36.423,29.185 37.002,29.185 C11.1
NetC11_2: C11.2 R35.2 U3.10 | length 12.9
  Top Layer w0.254: U3.10@36.98,25.562 36.99,25.552 36.99,24.222 v1(37,24.212)
  Bottom Layer w0.254: v1(37,24.212) 37,27.489 C11.2 C11.2 37.325,27.737 38.486,26.576 44.064,26.576 R35.2
NetC12_1: C12.1 R28.2 R29.1 TP10.1 U3.8 | length 15.2
  Top Layer w0.254: TP10.1@30.825,22.787 R29.1 34.44,22.879 34.44,25.562 34.426,25.576 32.436,25.576 31.752,26.26 R28.2 31.527,26.262 v1(33,26.262)
  Bottom Layer w0.254: v1(33,26.262) 33,28.062 33.825,28.887 C12.1
NetC12_2: C12.2 R36.2 U3.12 | length 12.3
  Top Layer w0.254: v1(36.1,26.912) 36.119,26.893 38.664,26.893 39.52,26.037 39.52,25.562 39.523,25.559 39.523,24.215 v1(39.525,24.212)
  Bottom Layer w0.254: C12.2 35.075,27.687 35.782,26.98 36.032,26.98 v1(36.1,26.912) ; v1(39.525,24.212) 42.425,24.212 43,24.787 44.475,24.787 R36.2
NetC14_1: C14.1 C16.1 SW1.2 TP18.1 | length 5.4
  Top Layer w0.254: C14.1 69.327,27.6 C14.1@69.75,28.023 ; C14.1@69.75,27.6 72.7,27.6 73.25,28.15 C16.1
NetC14_2: C14.2 U4.16 | length 9.2
  Top Layer w0.254: C14.2@69.75,24.9 70.5,24.9 71.479,23.921 75.41,23.921 75.781,24.292 75.781,25.296 75.93,25.445 77.283,25.445 U4.16
NetC15_1: C15.1 U4.6 | length 4.3
  Top Layer w0.254: U4.6 C15.1@87.25,28.725 ; C15.1@86.85,29 C15.1@87,28.85
NetC15_2: C15.2 U4.4 | length 4.8
  Top Layer w0.254: U4.4@83.238,27.475 U4.4 84.975,27.425 86.5,25.9 C15.2
NetC16_2: C16.2 U4.10 | length 4.3
  Top Layer w0.254: C16.2 75.681,30.85 76.073,30.458 76.073,29.859 76.507,29.425 77.262,29.425 U4.10
NetC17_1: C17.1 TP21.1 U4.7 U4.13 | length 14
  Top Layer w0.254: U4.13 77.363,27.475 78.187,27.475 79.231,28.519 79.231,28.633 v1(79.299,28.701) ; v1(81.5,29.25) 81.596,29.25 81.721,29.375 U4.7 83.238,29.425 83.993,29.425 84.258,29.69 C17.1@84.258,32.662 ; C17.1 C17.1@84.258,32.662 ; TP21.1 84.408,32.512 C17.1@84.258,32.662
  Bottom Layer w0.254: v1(79.299,28.701) 79.848,29.25 v1(81.5,29.25)
NetC18_1: C18.1 D1.2 L1.2
NetC18_2: C18.2 L2.1 TP22.1 U5.1
NetC21_2: C21.2 R37.1 R38.2 TP24.1 U5.3 | length 5.4
  Top Layer w0.254: U5.3 81.775,12.525 v1(82.5,13.25)
  Bottom Layer w0.254: R37.1 R38.2@81.073,8.65 ; R38.2@81.073,8.25 R38.2@81.073,8.327 ; C21.2 v1(82.5,13.25)
NetC22_1: C22.1 pad.2 R39.1 R40.2 TP25.1 | length 9.6
  Top Layer w0.254: 66,10.15 66.05,10.2 TP25.1@68.4,10.2 ; TP25.1 v1(70.9,10.201) ; pad.2 70.863,11.538 70.863,10.238 v1(70.9,10.201)
  Bottom Layer w0.254: R39.1 R40.2 70.378,10.627 70.804,10.201 v1(70.9,10.201)
NetC25_2: C25.2 pad.6 | length 4
  Top Layer w0.254: v1(70.65,17.7) 71.475,16.875 pad.6
  Bottom Layer w0.254: C25.2 70.65,16.1 v1(70.65,17.7)
NetR1_2: R1.2 R2.1 U1.2 | length 4.8
  Top Layer w0.254: U1.2 13.987,33.075 13.566,33.496 13.289,33.773 R1.2 R2.1
NetR3_2: R3.2 R4.1 U1.6 | length 4.6
  Top Layer w0.254: R4.1 R3.2 8.75,33.948 8.75,31 8.85,30.9 U1.6
NetR5_2: R5.2 R6.1 U1.9 | length 7.6
  Top Layer w0.254: R6.1 R5.2 4.764,28.921 5.961,28.921 8.907,25.975 U1.9
NetR7_2: R7.2 R8.1 U1.13 | length 6.7
  Top Layer w0.254: R7.2 R8.1 12.698,22.977 13.987,24.266 U1.13
NetR9_2: R9.2 R10.1 U3.2 | length 1.3
  Top Layer w0.254: R9.2 R10.1
NetR11_2: R11.2 R12.1 U3.6 | length 4.7
  Top Layer w0.254: R12.1 R11.2 35.221,31.926 35.71,31.437 U3.6@35.71,30.962
NetR12_2: R12.2 R41.1 R47.2 U3.7 | length 37.1
  Top Layer w0.254: v1(28.194,20.828) 34.811,20.828 37.378,18.261 R41.1 38.608,18.034 39.624,17.018 41.557,17.018 43.023,15.552 R47.2 ; v1(28.194,26.924) 28.194,30.226 30.241,32.273 33.543,32.273 ; R12.2 32.45,33.735 32.45,33.367 33.543,32.273 ; U3.7 34.48,31.337 33.543,32.273
  Bottom Layer w0.254: v1(28.194,20.828) v1(28.194,26.924)
NetR19_2: R19.2 R20.1 U2.2 | length 4.4
  Top Layer w0.254: U2.2 14.04,14.675 13.552,15.163 R19.2 R20.1
NetR21_2: R21.2 R22.1 U2.6 | length 4.2
  Top Layer w0.254: R22.1 R21.2 8.96,16.988 U2.6
NetR23_2: R23.2 R24.1 U2.9 | length 7.2
  Top Layer w0.254: R23.2 R24.1 7.302,10.802 8.656,9.448 8.787,9.448 8.96,9.275 U2.9
NetR25_2: R25.2 R26.1 U2.13 | length 6.6
  Top Layer w0.254: R25.2 R26.1 12.948,5.977 14.04,7.069 U2.13
NetR27_2: R27.2 R28.1 U3.9 | length 7.3
  Top Layer w0.254: R27.2@31.475,29.512 R27.2 31.475,27.914 R28.1 32.473,26.916 32.684,26.916 32.716,26.948 34.608,26.948 35.161,26.395 35.161,26.259 35.31,26.11 35.577,26.11 35.75,25.937 U3.9
NetR29_2: R29.2 R30.1 U3.13 | length 7.1
  Top Layer w0.254: R29.2 39.475,22.787 R30.1 39.6,22.889 40.79,24.079 U3.13@40.79,25.562
NetR30_2: R30.2 R42.1 R46.1 U3.14 | length 19.7
  Top Layer w0.254: R42.1 29.477,15.802 33.233,19.558 v1(34.29,19.558) ; v1(38.71,19.5) R46.1 41.198,22.656 R30.2 41.204,22.889 42.1,23.785 U3.14
  Bottom Layer w0.254: v1(34.29,19.558) v1@38.608,19.558
NetR41_2: R41.2 R42.2 U7.2 | length 14.7
  Top Layer w0.254: R42.2 29.023,14.198 28.238,13.413 28.238,12.24 28.461,12.017 31.978,12.017 32.421,12.46 U7.2 ; R42.2@29.777,14.527 32.5,17.25 33.284,18.034 R41.2
NetR43_2: R43.2 R44.1 U7.3 | length 5.3
  Top Layer w0.254: R44.1 R43.2 30.508,9.552 30.876,9.92 U7.3
NetR44_2: R44.2 SW1.4 TP13.1 U7.1 | length 29.3
  Top Layer w0.254: R44.2 29.477,12.802 31.661,14.986 32.736,14.986 U7.1 v1(38.961,8.789) ; v1(45.259,8.789) 50.827,8.789 SW1.4
  Bottom Layer w0.254: v1(38.961,8.789) v1(45.259,8.789)
NetR45_2: R45.2 R46.2 U7.6 | length 16.3
  Top Layer w0.254: R46.2 43.059,19.243 43.059,18.691 46.228,15.522 46.228,10.922 v1(45.212,9.906)
  Bottom Layer w0.254: U7.6 40.377,9.913 45.205,9.913 v1(45.212,9.906)
NetR47_1: R47.1 R48.1 U7.5 | length 6.5
  Top Layer w0.254: U7.5 41.75,8.76 41.75,11.331 43.023,12.604 R48.1
NetR48_2: R48.2 SW1.1 TP17.1 U7.7 | length 19.1
  Top Layer w0.254: R48.2 v1(45.25,11)
  Bottom Layer w0.254: U7.7 43.79,12.46 51.919,4.331 53.327,4.331 SW1.1
RX_I: C1.1 J1.1 J3.1 R1.1 TP12.1 | length 89.1
  Top Layer w0.254: J1.1 6.75,0.87 45.41,0.87 J3.1 ; v1(9.5,32.25) 9.524,32.274 10.186,32.274 11.685,33.773 R1.1
  Bottom Layer w0.254: J1.1 1,6.62 1,30.25 3,32.25 v1(9.5,32.25) 9.568,32.182 9.568,31.694 12.412,28.85 C1.1
RX_Q: C7.1 J1.3 J3.2 R19.1 TP15.1 | length 61.3
  Top Layer w0.254: J1.3 11.608,3.988 42.012,3.988 J3.2 ; v1(10.75,15.5) 10.75,15.575 11.948,16.773 R19.1
  Bottom Layer w0.254: J1.3 4.826,7.874 4.826,13.462 6.864,15.5 v1(10.75,15.5) 10.75,13.85 C7.1
V_NEG: C20.2 C21.1 C24.2 L1.1 pad.5 pad.8 R37.2 TP23.1 | length 14.8
  Top Layer w0.254: L1.1 82.624,17.876 82.624,19.647 83.477,20.5 TP23.1
  Bottom Layer w0.254: R37.2 79.25,12.525 ; v1(79.809,14.611) 79.25,14.052 79.25,12.525 ; C21.1 79.9,13.175 79.25,12.525
pads on no net: SW1.6 SW1.7

## Polygon pours and split planes (outlines as drawn)
GND on Top Layer "NONET_L01_P004" (solid, shelved, pour order 4): 30.75,4.75 34.25,4.75 51.25,4.75 51.25,0 0,0 0,4.75
-5 on Top Layer "NONET_L01_P002" (solid, shelved, pour order 2): 67.4,7.2 72.15,7.2 72.15,11.45 69.4,14.2 67.4,14.2
V_NEG on Top Layer "NONET_L01_P013" (solid, shelved, pour order 13): 77.75,20.5 76.5,19.25 69.25,19.25 69.25,14.175 78.075,14.175 79.1,13.15 83.6,13.15 83.6,20.5
NetC18_2 on Top Layer "NONET_L01_P006" (solid, shelved, pour order 6): 83.6,10.5 83.6,10.3 83.15,9.85 80.925,9.85 80.925,1.75 81.8,0.875 89.25,0.875 89.25,10.5
GND on Top Layer "NONET_L01_P001" (solid, shelved, pour order 1): 74.25,6.436 74.25,2.75 71.65,2.75 71.65,7.2 71.65,14.45 77.75,14.45 77.75,9.81
+5 on Top Layer "NONET_L01_P007" (solid, shelved, pour order 7): 75.325,7.075 74.5,7.075 74.5,0.913 75.35,0.913 80.2,0.937 80.2,12.25 80.175,12.275 77.9,12.275 77.9,9.65
NetC18_1 on Top Layer "NONET_L01_P009" (solid, shelved, pour order 9): 87.225,13.525 89.4,13.525 89.35,13.475 89.35,11.05 87.25,11.05 87.225,11.025 83.65,11.025 83.65,20.425 87.225,20.425
GND on Bottom Layer "NONET_L02_P000" (solid, shelved, pour order 0): 0,0 0,38.1 90.2,38.1 90.2,0

## Silkscreen, mask and mechanical layers (free items; w line width, h text height)
Top Overlay:
  drawing of 4 lines, arcs and shapes, not listed
  text "I5" at 44.754,36.996 h1.52 r270
  text "Never give up..." at 56.388,35.306 h2.03
  text "OUT" at 83.058,34.798 h1.52
  text "Q5" at 29.254,21.746 h1.52 r270
  text "Q2" at 2.754,19.996 h1.52 r270
  text "Q1" at 18.504,19.496 h1.52 r270
  text "U6" at 67.254,14.754 h1.02
  text "Q4" at 20.004,7.746 h1.52 r270
  text "Q3" at 1.254,7.246 h1.52 r270
  text "EXT DEMOD" at 40.754,4.004 h1.02
  text "\"Fodufodu yullelofue...!?!\"" at 19.812,2.032 h2.03
  text "IN" at 16.51,1.778 h1.52
Bottom Overlay:
  drawing of 9 lines, arcs and shapes, not listed
  text "Good job guys!" at 60.238,47.195 h2.8
  text "Joe Dai / Lance Shih / Luna Sun / 2024.3" at 43.312,34 h1.02
  text "-Luna 2024" at 58.32,5.561 h1.02 r345
  text "B5 - Demodulator" at 89.496,0.754 h1.52
Mechanical 1:
  text ".Designator" at 84.603,27.619 h0.7
Top 3D Body:
  circle w0.1: c70.261,12.811 r0.5
  lines w0.1: 69.6,12.15 72.7,12.15 72.7,15.25 69.6,15.25 69.6,12.15
Top Courtyard:
  lines w0.05: 69.5,10.9 72.8,10.9 72.8,16.5 69.5,16.5 69.5,10.9
  lines w0.1: 70.65,13.7 71.65,13.7 ; 71.15,13.2 71.15,14.2

## Text inside footprints (layer, text, board x,y; h text height)
SW1: Top 3D Body "*" at 55.931,4.445 h1.27 r180; Top Overlay "*" at 57.404,2.54 h1.27 r180
U4: Top 3D Body "*" at 82.434,26.544 h1.27 r180; Top Overlay "*" at 83.759,25.247 h1.27 r180